# Altium PCB PET_D_Robin_Moussu.PCBDOC
Units mil, origin at the board's own origin, x right, y up, seen from the top; angles counter-clockwise.
Board outline 3937.01 x 2755.91 mil, 4 copper layers (Top Layer, Internal Plane 1, Internal Plane 2, Bottom Layer); 27 components, 27 nets, 115 pads, 0 vias.
Unrouted connection lines stored in the file: 5.
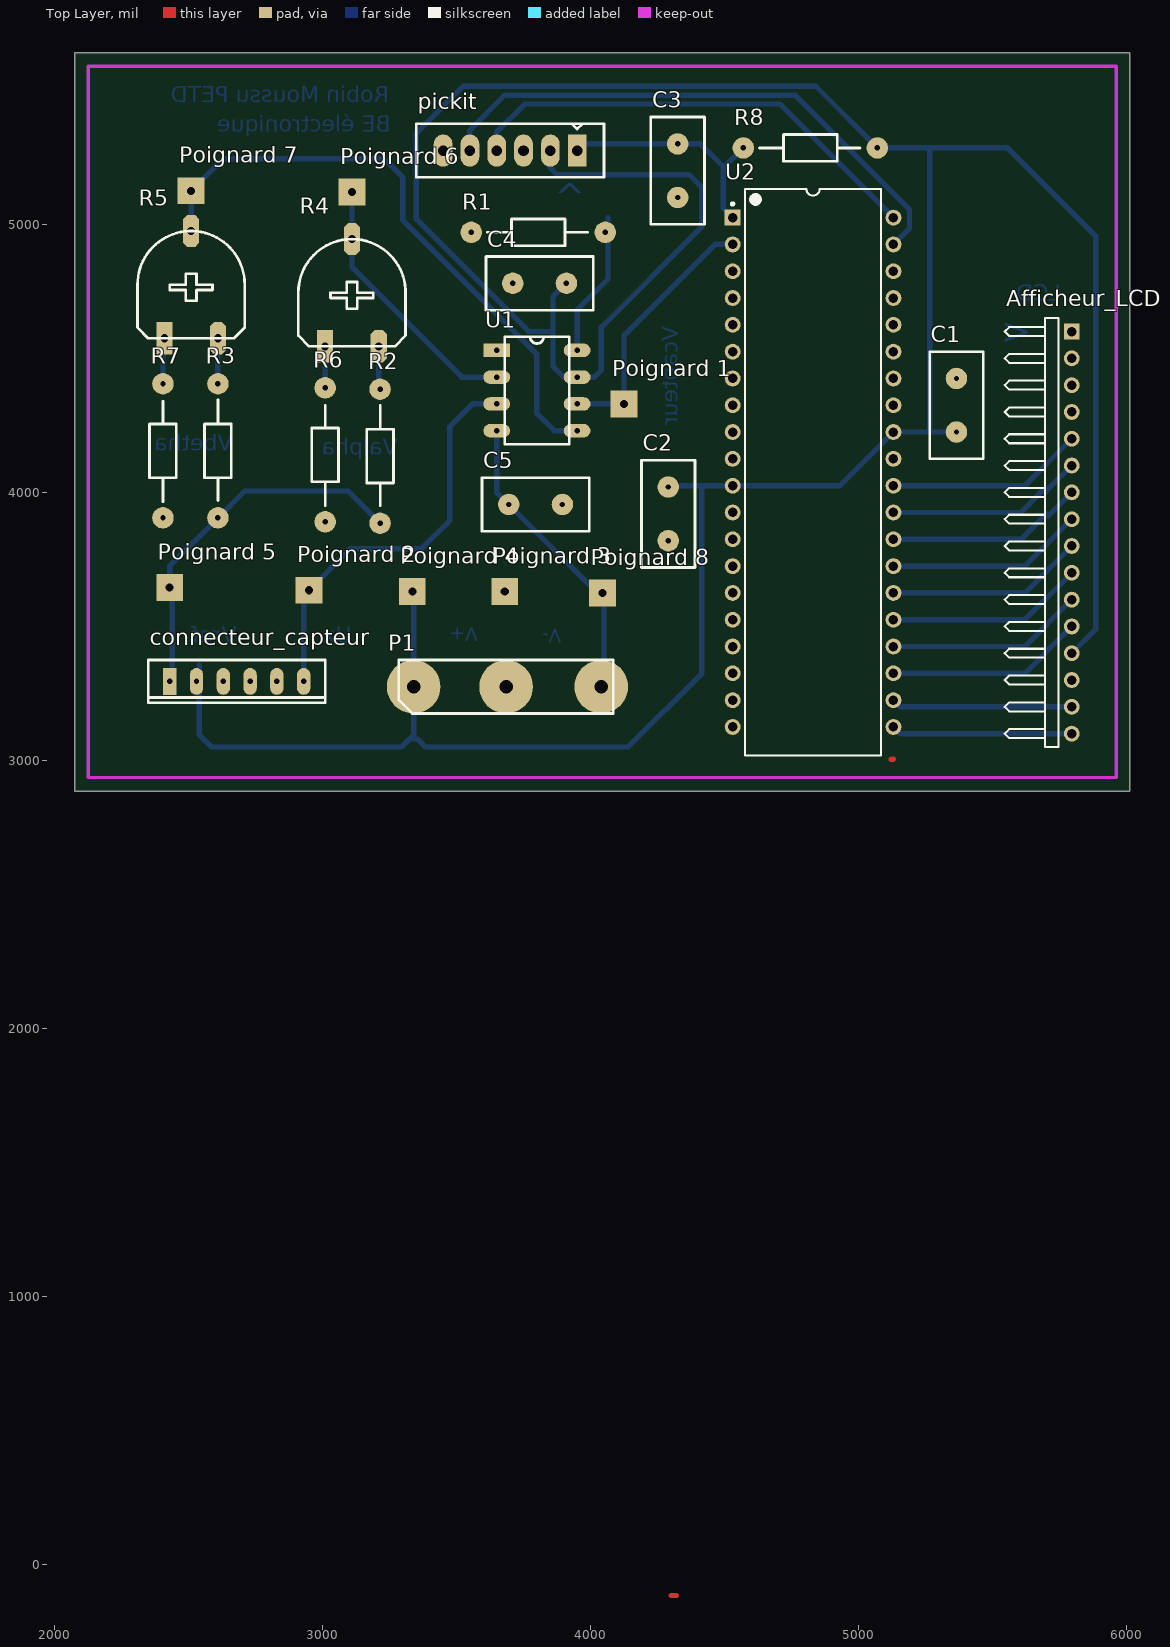
[diagram p0: Top Layer view]
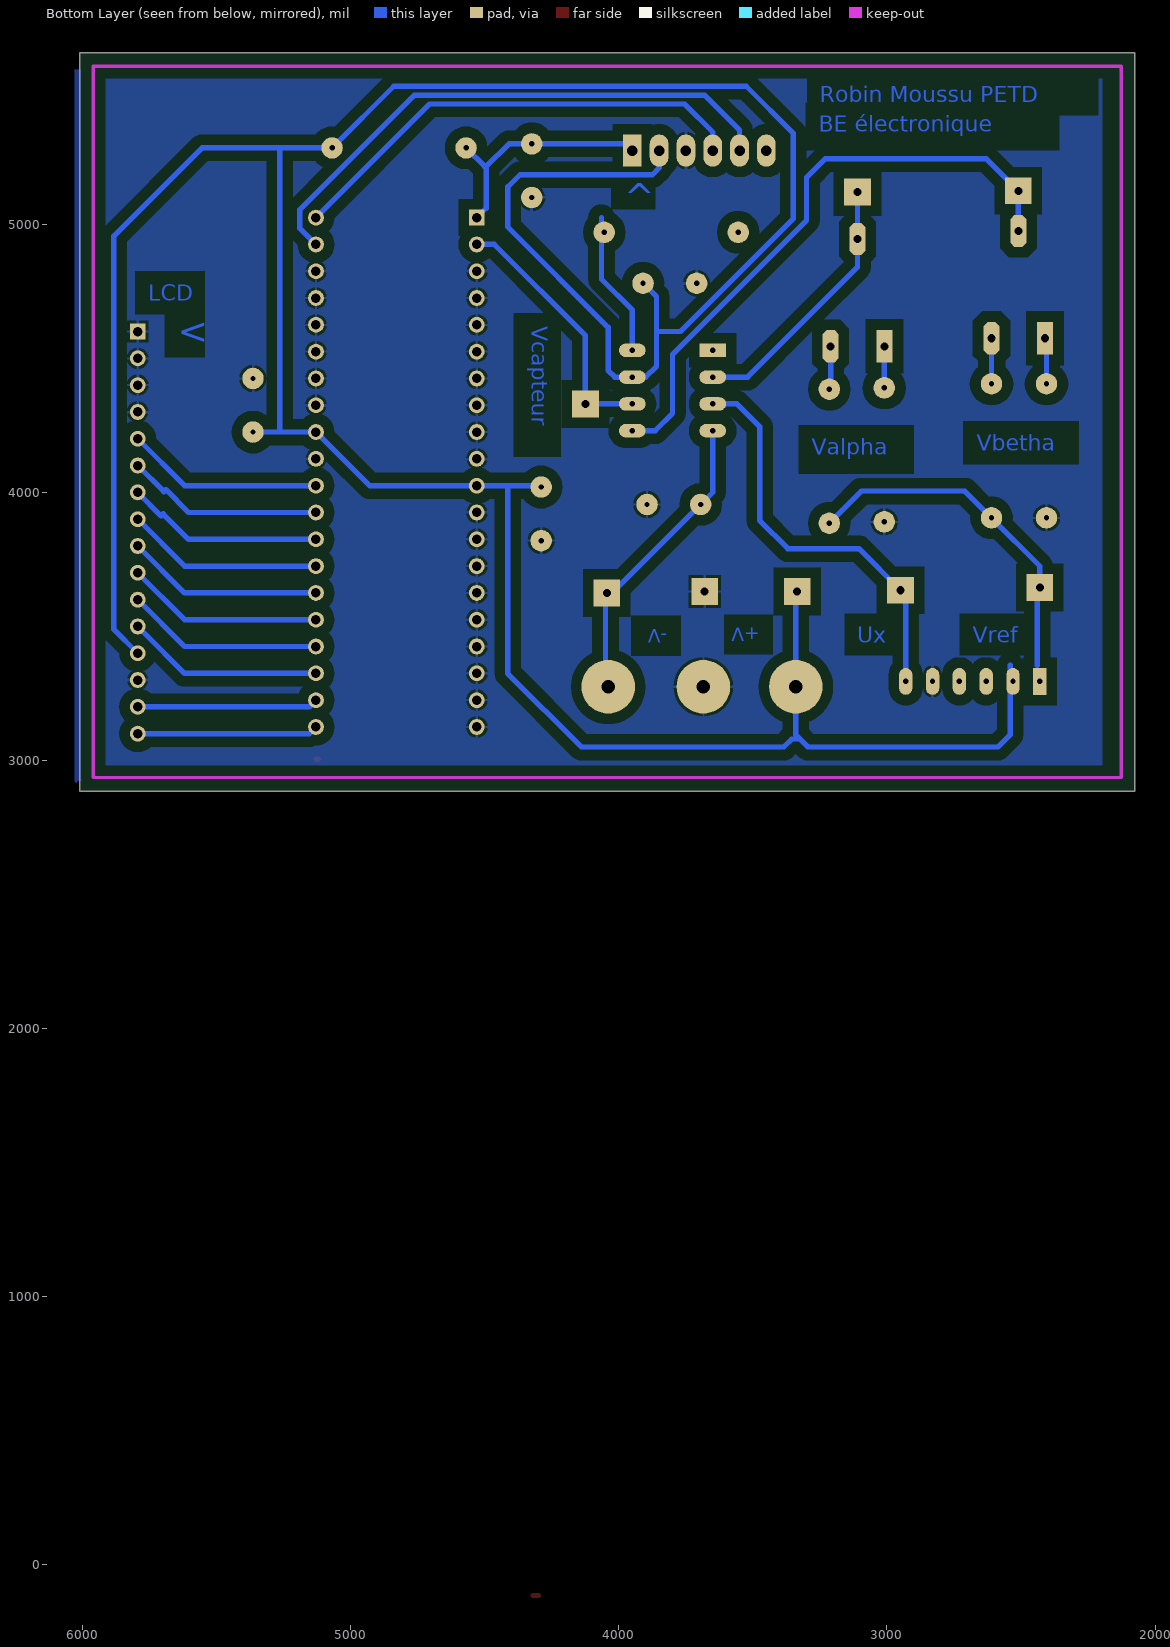
[diagram p1: Bottom Layer view, seen from below]
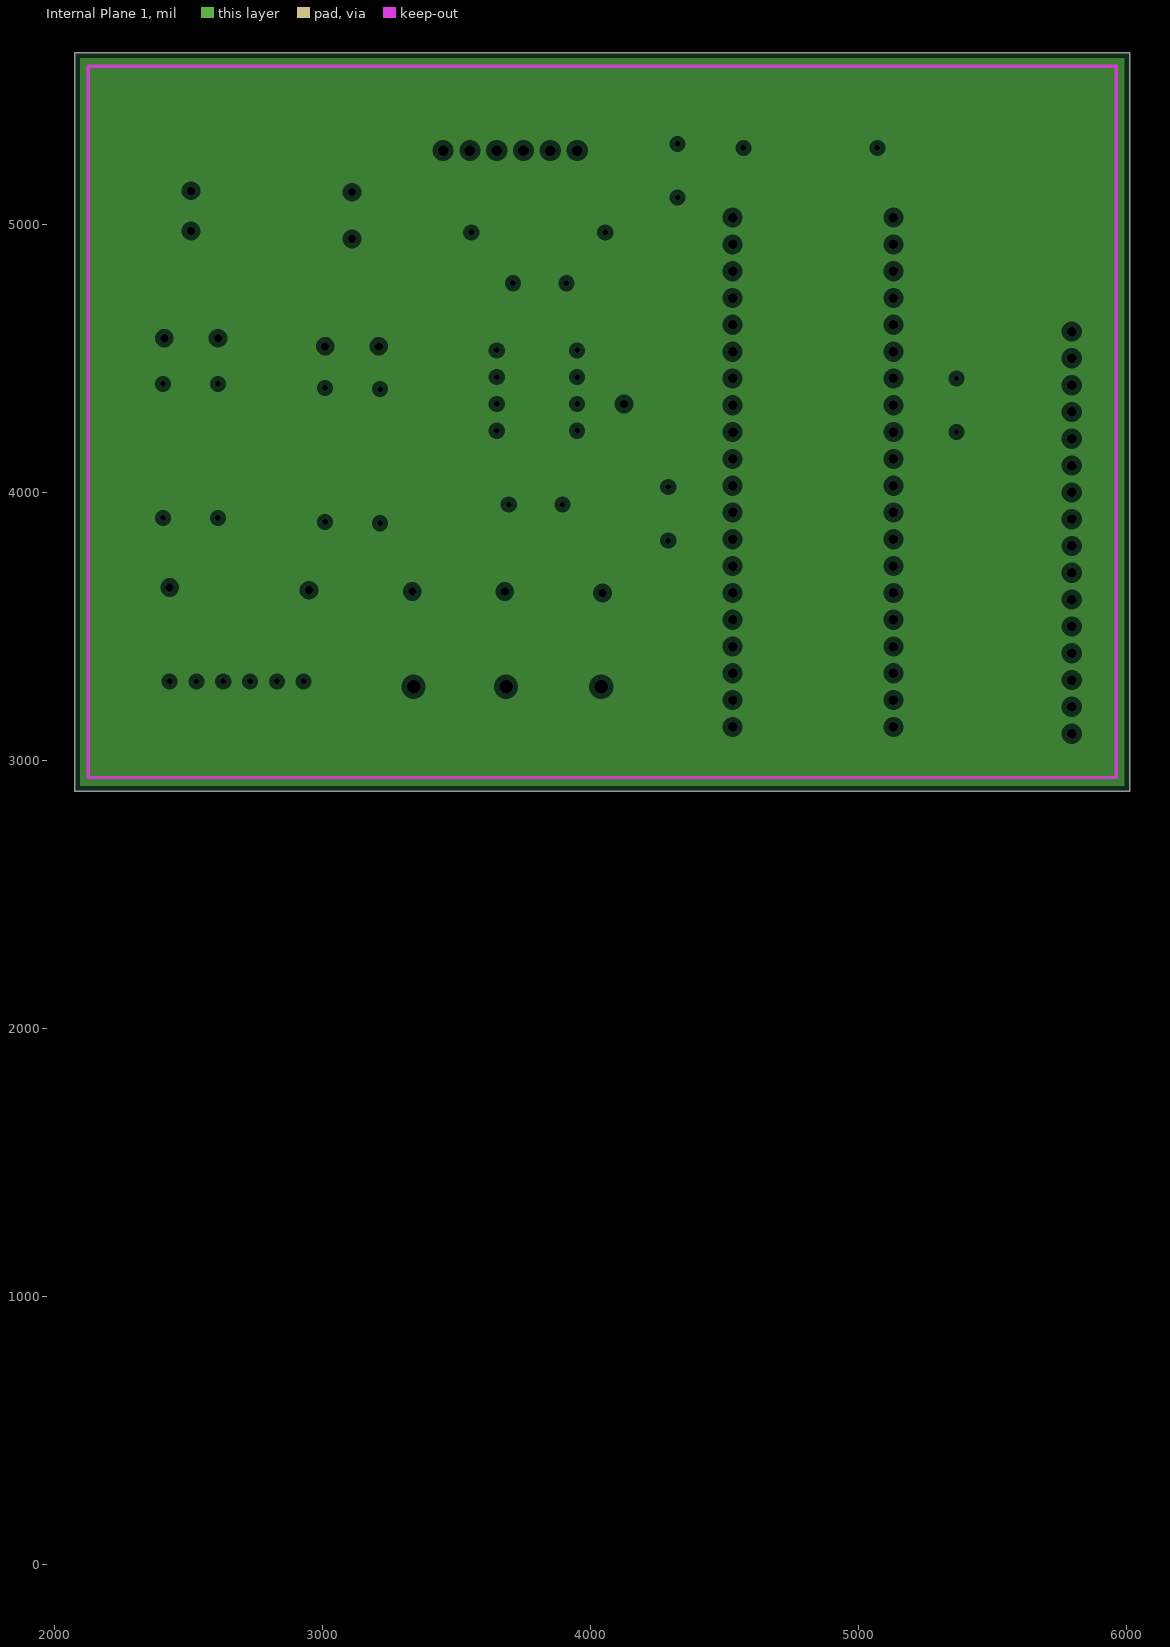
[diagram p2: Internal Plane 1, clearances drawn from the general rule]
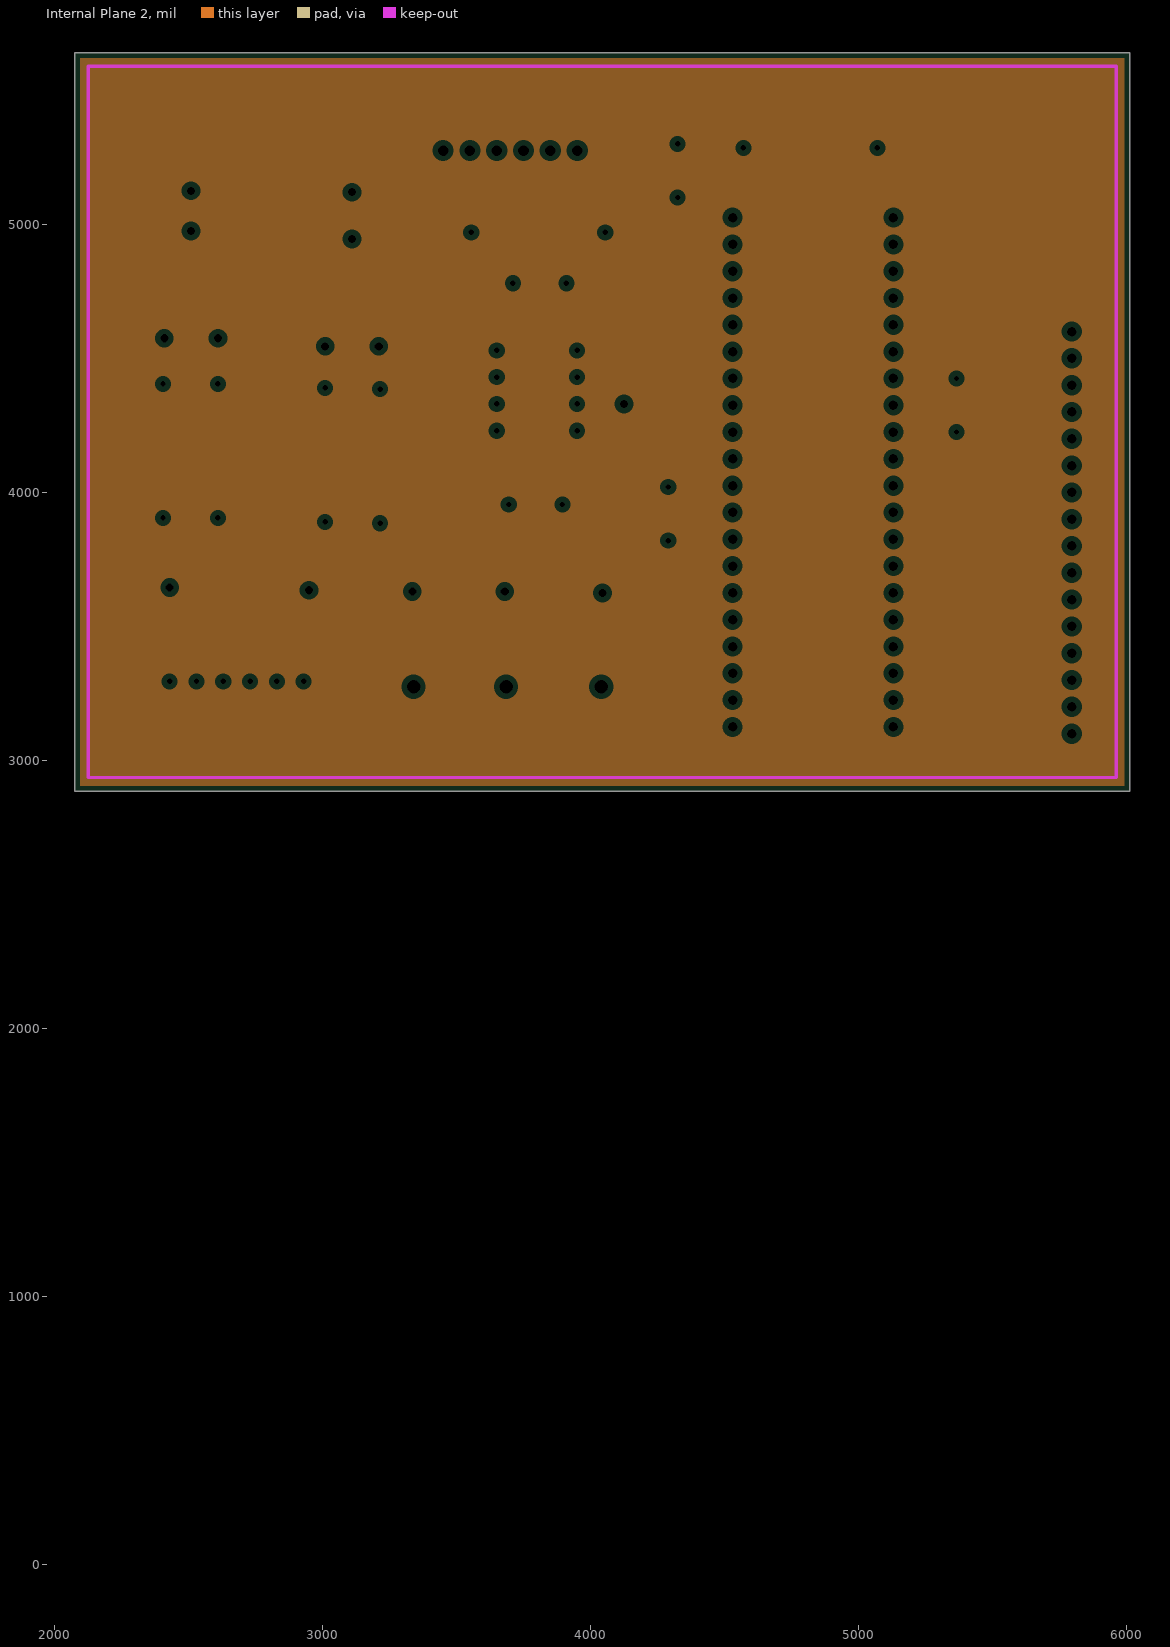
[diagram p3: Internal Plane 2, clearances drawn from the general rule]

## Layer stack, top to bottom
Top Layer: signal copper 1.4
Dielectric: dielectric 12.6, FR-4, Dk 4.8
Internal Plane 1: plane copper 1.4
Dielectric: dielectric 12.6, FR-4, Dk 4.8
Internal Plane 2: plane copper 1.4
Dielectric: dielectric 12.6, FR-4, Dk 4.8
Bottom Layer: signal copper 1.4

## Board outline
2075,2885 6012.01,2885 6012.01,5640.91 2075,5640.91

## Design rules (kind name [scope] priority, off if disabled: settings)
Clearance clearance_plan [InPolygon] p1: gap=40
Clearance [All] p2: gap=13
FabricationTestPointUsage TestPointUsage [All] p1: valid=0 allowmultiple=FALSE
FabricationTestpoint Testpoint [All] p1: side=3 testpointundercomponent=TRUE minsize=40 maxsize=100 preferedsize=60 minholesize=0 maxholesize=40 preferedholesize=32 testpointgrid=1 allowsidetop=TRUE allowsidebottom=TRUE usegrid=TRUE gridtolerance=0.01
PlaneClearance [All] p1: clearance=20
PlaneConnect [All] p1: planeconnectstyle=Relief reliefexpansion=20 reliefentries=4 reliefconductorwidth=10 reliefairgap=10
PolygonConnect [All] p1: connectstyle=Relief reliefconductorwidth=10 reliefentries=4 polygonreliefangle="90 Angle" airgapwidth=10
RoutingVias [All] p1: holewidth=20 width=70 viastyle="Through Hole" minholewidth=28 minwidth=50 maxholewidth=28 maxwidth=50
SolderMaskExpansion [All] p1: expansion=4
Width [All] p1: maxlimit=20 minlimit=20 preferedwidth=20
24 further rules are at their usual default settings.

## Components (designator, comment, footprint, x,y, rotation, side; value= is the part's Value field where it differs from the comment)
Afficheur_LCD "Header 16H" HDR1X16H 5795,4600 r270 top
C1 "Cap2" CAPA2 5365,4425 r270 top
C2 "Cap2" CAPA2 4290,3820 r90 top
C3 "Cap2" CAPA2 4325,5100 r90 top
C4 "Cap2" CAPA2 3710,4780 r0 top
C5 "Cap2" CAPA2 3895,3955 r180 top
connecteur_capteur "CONKK6" CONKK6 2430,3295 r0 top
P1 "Alim_double_erg" Alim_double_erg 3385,3275 r90 top
pickit "pickit3" pickit3 3950,5275 r180 top
"Poignard 1" "Poignard" Poignard 4125,4330 r90 top
"Poignard 2" "Poignard" Poignard 2950,3635 r270 top
"Poignard 3" "Poignard" Poignard 3680,3630 r270 top
"Poignard 4" "Poignard" Poignard 3335,3630 r270 top
"Poignard 5" "Poignard" Poignard 2430,3645 r270 top
"Poignard 6" "Poignard" Poignard 3110,5120 r90 top
"Poignard 7" "Poignard" Poignard 2510,5125 r180 top
"Poignard 8" "Poignard" Poignard 4045,3625 r90 top
R1 "Res2" res5_1/4W 3555,4970 r0 top
R2 "Res2" res5_1/4W 3215,4385 r270 top
R3 "Res2" res5_1/4W 2610,4405 r270 top
R4 "RPot1" AJUSTABLE 3010,4545 r0 top
R5 "RPot1" AJUSTABLE 2410,4575 r0 top
R6 "Res2" res5_1/4W 3010,3890 r90 top
R7 "Res2" res5_1/4W 2405,3905 r90 top
R8 "Res2" res5_1/4W 4570,5285 r0 top
U1 "AD620AN" DIP8 3650,4530 r0 top
U2 "PIC18F4520-I/P" PDIP600-P40 4830,4075 r0 top

## Footprints (in the part's own frame and the unit in brackets; to place one, negate y for a bottom-side part, rotate by r counter-clockwise, add the part's x,y. Pads: shape width x height; smd on the part's side, far side on the other; paste and mask are expansions set on the pad)
AJUSTABLE [mil]
  rect 60x120 hole 30: 1(0,0)
  oct 60x120 hole 30: 2(200,0) 3(100,400)
  silkscreen extent -100,0 300,400
Alim_double_erg [mil]
  round 200 hole 50: 1(0,45) 2(0,-300) 3(0,-655)
  silkscreen extent -100,-700 100,100
CAPA2 [mil]
  round 80 hole 20: 1(0,0) 2(200,0)
  silkscreen extent -100,-100 300,100
CONKK6 [mil]
  rect 50x100 hole 20: 1(0,0)
  oval 50x100 hole 20: 2(100,0) 3(200,0) 4(300,0) 5(400,0) 6(500,0)
  silkscreen extent -80,-80 580,80
DIP8 [mil]
  rect 100x50 hole 20: 1(0,0)
  oval 100x50 hole 20: 2(0,-100) 3(0,-200) 4(0,-300) 5(300,-300) 6(300,-200) 7(300,-100) 8(300,0)
  silkscreen extent 30,-350 270,50
HDR1X16H [mm] "Connector; Header; 16 Position; Right Angle"
  rect 1.5x1.5 hole 0.9: 1(0,0)
  round 1.5 hole 0.9: 2(2.54,0) 3(5.08,0) 4(7.62,0) 5(10.16,0) 6(12.7,0) 7(15.24,0) 8(17.78,0) 9(20.32,0) 10(22.86,0) 11(25.4,0) 12(27.94,0) 13(30.48,0) 14(33.02,0) 15(35.56,0) 16(38.1,0)
  silkscreen extent -1.27,-6.35 39.37,-1.27
PDIP600-P40 [mm] "DIP, 40-Leads, Row Spacing 15.24mm, Pitch 2.54mm, Body 51.8x13.5mm"
  rect 1.5x1.5 hole 0.9: 1(-7.62,24.13)
  round 1.5 hole 0.9: 2(-7.62,21.59) 3(-7.62,19.05) 4(-7.62,16.51) 5(-7.62,13.97) 6(-7.62,11.43) 7(-7.62,8.89) 8(-7.62,6.35) 9(-7.62,3.81) 10(-7.62,1.27) 11(-7.62,-1.27) 12(-7.62,-3.81) 13(-7.62,-6.35) 14(-7.62,-8.89) 15(-7.62,-11.43) 16(-7.62,-13.97) 17(-7.62,-16.51) 18(-7.62,-19.05) 19(-7.62,-21.59) 20(-7.62,-24.13) 21(7.62,-24.13) 22(7.62,-21.59) 23(7.62,-19.05) 24(7.62,-16.51) 25(7.62,-13.97) 26(7.62,-11.43) 27(7.62,-8.89) 28(7.62,-6.35) 29(7.62,-3.81) 30(7.62,-1.27) 31(7.62,1.27) 32(7.62,3.81) 33(7.62,6.35) 34(7.62,8.89) 35(7.62,11.43) 36(7.62,13.97) 37(7.62,16.51) 38(7.62,19.05) 39(7.62,21.59) 40(7.62,24.13)
  silkscreen extent -7.74,-26.85 6.45,26.85, body extent -7.3,-26.85 7.3,26.85, height 6.35
pickit3 [mil]
  rect 70x120 hole 39.37: 1(0,0)
  oval 70x120 hole 39.37: 2(100,0) 3(200,0) 4(300,0) 5(400,0) 6(500,0)
  silkscreen extent -100,-100 600,100
Poignard [mil]
  rect 100x100 hole 30: 1(0,0)
res5_1/4W [mil]
  round 80 hole 20: 1(0,0) 2(500,0)
  silkscreen extent 60,-50 435,50

## Part data
Afficheur_LCD: "Header, 16-Pin, Right Angle"
C1 C2 C3 C4 C5: "Capacitor"
P1: "3-Pin"
R1 R2 R3 R6 R7 R8: "Resistor"
R4 R5: "Potentiometer"
U1: "Low-Cost, Low-Power Instrumentation Amplifier"
U2: "Enhanced Flash Microcontroller with 10-Bit A/D and nanoWatt Technology, 32K Flash, 40-Pin PDIP, Industrial Temperature Range"

## Nets (pads, with @x,y where several pads share a name; then routed paths per layer and width w, separated by ;. In a path a pad name is that pad's centre, name@x,y a point inside that pad or via, vN(x,y) a via of type N, cw(c..) or ccw(c..) an arc to the next point about the centre after c; other vN are vias at no path point)
D0: Afficheur_LCD.8 U2.27 | length 746.8
  Top Layer w20: 5120.71,3005 5130,3005
  Bottom Layer w20: U2.27 5620,3725 Afficheur_LCD.8
D1: Afficheur_LCD.7 U2.28 | length 733.1
  Bottom Layer w20: U2.28 5605,3825 5700,3920 ; 5707.5,3912.5 Afficheur_LCD.7
D2: Afficheur_LCD.6 U2.29 | length 733.1
  Bottom Layer w20: U2.29 5605,3925 5690,4010 ; 5697.5,4002.5 Afficheur_LCD.6
D3: Afficheur_LCD.5 U2.30 | length 737.5
  Bottom Layer w20: U2.30 5620,4025 Afficheur_LCD.5
E: Afficheur_LCD.9 U2.26 | length 737.5
  Bottom Layer w20: U2.26 5620,3625 Afficheur_LCD.9
GND: "Poignard 3.1" Afficheur_LCD.1 Afficheur_LCD.2 Afficheur_LCD.3 Afficheur_LCD.4 Afficheur_LCD.14 C1.1 C2.1 C3.1 C4.1 C5.1 connecteur_capteur.5 P1.2 pickit.3 R6.1 R7.1 U2.3 U2.4 U2.5 U2.6 U2.7 U2.8 U2.9 U2.10 U2.12 U2.13 U2.14 U2.15 U2.16 U2.17 U2.18 U2.19 U2.20 U2.31 U2.33 U2.34 U2.35 U2.36 U2.37 U2.38
MCLR: C3.2 pickit.1 R8.1 U2.1 | length 899.1
  Bottom Layer w20: pickit.1 3975,5300 4365,5300 4410,5300 4495,5215 ; U2.1 4495,5060 4495,5215 ; R8.1 4500,5215 4495,5215
NetR1_1: R1.1 U1.1
NetR1_2: R1.2 U1.8 | length 542.6
  Bottom Layer w20: U1.8 3950,4680 4065,4795 4065,5025
NetR2_1: R2.1 R4.2 | length 155
  Bottom Layer w20: R2.1@3210,4390 R4.2
NetR3_1: R3.1 R5.2 | length 170
  Bottom Layer w20: R3.1 R5.2
NetR4_1: R4.1 R6.2 | length 155
  Bottom Layer w20: R6.2 R4.1
NetR5_1: R5.1 R7.2 | length 165
  Bottom Layer w20: R7.2 R5.1@2405,4570
P15: Afficheur_LCD.15 U2.22 | length 675.4
  Bottom Layer w20: U2.22 5155,3200 Afficheur_LCD.15
P16: Afficheur_LCD.16 U2.21 | length 675.4
  Bottom Layer w20: U2.21 5155,3100 Afficheur_LCD.16
PGC: pickit.5 U2.39 | length 2102.6
  Bottom Layer w20: pickit.5 3550,5352 3680,5482 4763,5482 5190,5055 5190,4985 U2.39
PGD: pickit.4 U2.40 | length 1768.1
  Bottom Layer w20: pickit.4 3650,5344 3755,5449 4706,5449 U2.40
RS: Afficheur_LCD.11 U2.24 | length 737.5
  Bottom Layer w20: U2.24 5620,3425 Afficheur_LCD.11
RW: Afficheur_LCD.10 U2.25 | length 737.5
  Bottom Layer w20: U2.25 5620,3525 Afficheur_LCD.10
UX: "Poignard 2.1" connecteur_capteur.6 U1.3 | length 1541.2
  Bottom Layer w20: connecteur_capteur.6 2930,3615 2950,3635 3105,3790 3370,3790 3475,3895 3475,4245 3560,4330 U1.3
V0: Afficheur_LCD.12 U2.23 | length 705.7
  Bottom Layer w20: U2.23 5620,3325 5772.5,3477.5
VALPHA: "Poignard 6.1" R4.3 U1.2 | length 989.8
  Bottom Layer w20: 3110,5120 R4.3 3110,4840 3520,4430 U1.2
VBETA: "Poignard 7.1" R5.3 U1.5 | length 2282.7
  Bottom Layer w20: R5.3 2510,5125 2630,5245 3230,5245 3300,5175 3300,5015 3800,4515 3800,4295 3865,4230 U1.5
VCAPTEUR: "Poignard 1.1" U1.6 U2.2 | length 975.8
  Bottom Layer w20: U1.6 4125,4330 4125,4585 4465,4925 U2.2
VCC: "Poignard 4.1" Afficheur_LCD.13 C1.2 C2.2 C4.2 connecteur_capteur.2 P1.1 pickit.2 R8.2 U1.7 U2.11 U2.32 | length 13209.6
  Bottom Layer w20: 2540,3355 2540,3096.11 2586.11,3050 3295,3050 3325,3080 ; 3335,3615 3340,3610 P1.1 ; P1.1@3340,3270 3340,3095 3325,3080 ; pickit.2 3850,5210 3875,5185 4369.1,5185 4414.55,5139.55 4414.55,4990 4040,4615.45 4040,4455 4015,4430 U1.7 3900,4430 3860,4470 3860,4600 ; C4.2 3860,4730 3860,4600 ; C2.2@4295,4025 4415,4025 ; 5265,5280 5265,4225 ; C1.2 5265,4225 ; Afficheur_LCD.13 5885,3490 5885,4955 5555,5285 R8.2 4840,5515 3525,5515 3350,5340 3350,5020 3770,4600 3860,4600 ; 3325,3080 3355,3080 3385,3050 4140,3050 4415,3325 4415,4025 ; 4415,4025 U2.11 4930,4025 U2.32 5265,4225
VREF: "Poignard 5.1" connecteur_capteur.1 R2.2 R3.2 | length 1324.8
  Bottom Layer w20: 2440,3355 2440,3635 2430,3645 2430,3725 R3.2 2710,4005 3095,4005 R2.2
VSS: "Poignard 8.1" C5.2 P1.3 U1.4 | length 1035.7
  Bottom Layer w20: U1.4 3650,4000 C5.2 4050,3600 P1.3@4050,3360
pads on no net: connecteur_capteur.3 connecteur_capteur.4 pickit.6
copper on no net: | length 20
  Top Layer w20: 4300,-115 4320,-115

## Polygon pours and split planes (outlines as drawn)
GND on Bottom Layer "Top Layer-No Net" (solid, pour order 7): 2196.16,5577.22 6030.81,5577.22 6030.81,2923.33 6024.98,2917.5 6018.8,2923.68 2196.16,2923.68
no net on Internal Plane 1 (split plane): 5991.91,2905.1 2095.1,2905.1 2095.1,5620.81 5991.91,5620.81
no net on Internal Plane 2 (split plane): 5991.91,2905.1 2095.1,2905.1 2095.1,5620.81 5991.91,5620.81

## Keep-outs
Keep-Out Layer:
  lines w11.81: 2126.18,2936.18 5960.83,2936.18 5960.83,5589.72 2126.18,5589.72 2126.18,2936.18

## Other copper
Bottom Layer:
  text "Robin Moussu PETD" at 3250,5455 h60
  text "BE électronique" at 3255,5345 h60
  text "^" at 3980,5055 h100
  text "LCD" at 5755,4715 h60
  text "Vcapteur" at 4325,4620 h60 r90
  text "<" at 5645,4555 h100
  text "Vbetha" at 2665,4155 h60
  text "Valpha" at 3280,4140 h60
  text "Vref" at 2680,3440 h60
  text "Ux" at 3110,3440 h60

## Silkscreen, mask and mechanical layers (free items; w line width, h text height)
Drill Drawing:
  text ".LEGEND" at 6212.01,3085 h60
  text "Drill Drawing." at 6212.01,2985 h60

## Dimensions
2126.18,2936.18 to 5960.83,2936.18 on Mechanical 1
2126.18,2936.18 to 2126.18,5589.72 on Mechanical 1

## Text inside footprints (layer, text, board x,y; h text height)
P1: Bottom Layer "-V" at 3820,3490 h50 r180; Bottom Layer "+V" at 3475,3495 h50 r180